# Altium PCB mainPower_V2.PcbDoc
Units mm, origin at the board's own origin, x right, y up, seen from the top; angles counter-clockwise.
Board outline 71.12 x 47.37 mm, 2 copper layers (Top Layer, Bottom Layer); 57 components, 26 nets, 176 pads, 299 vias.
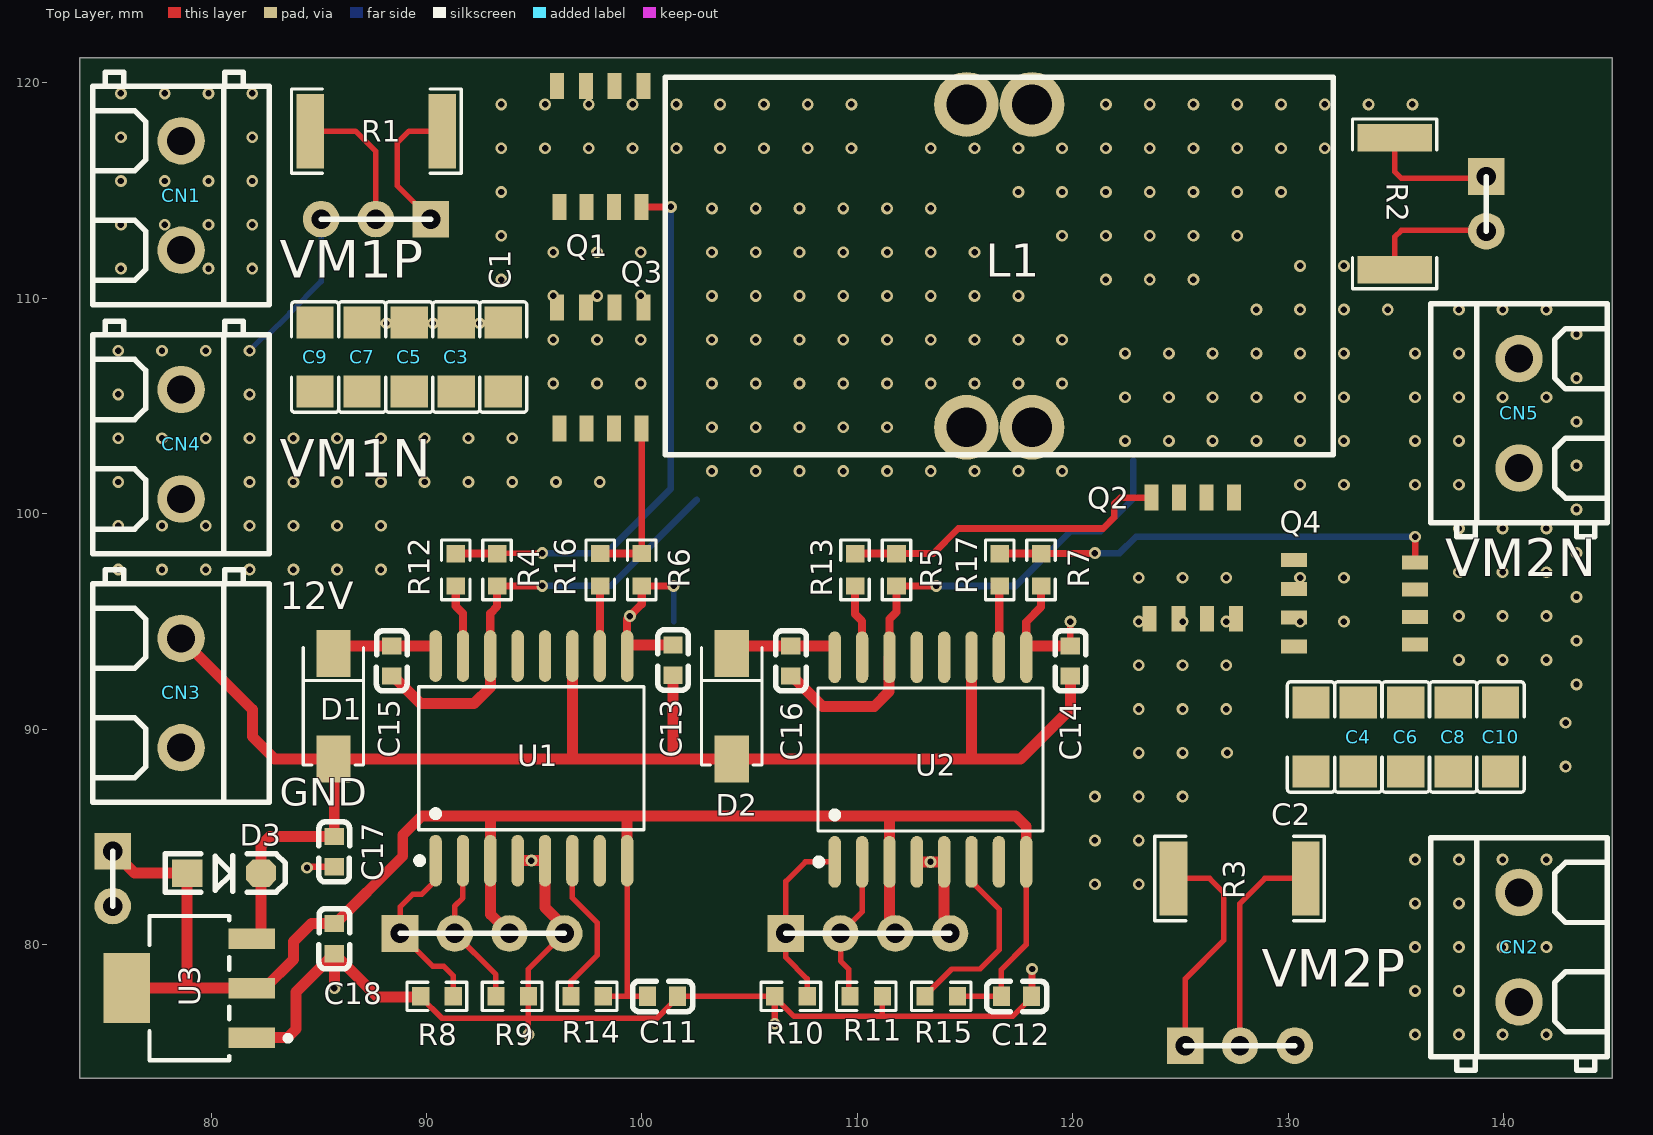
[diagram p0: Top Layer view]
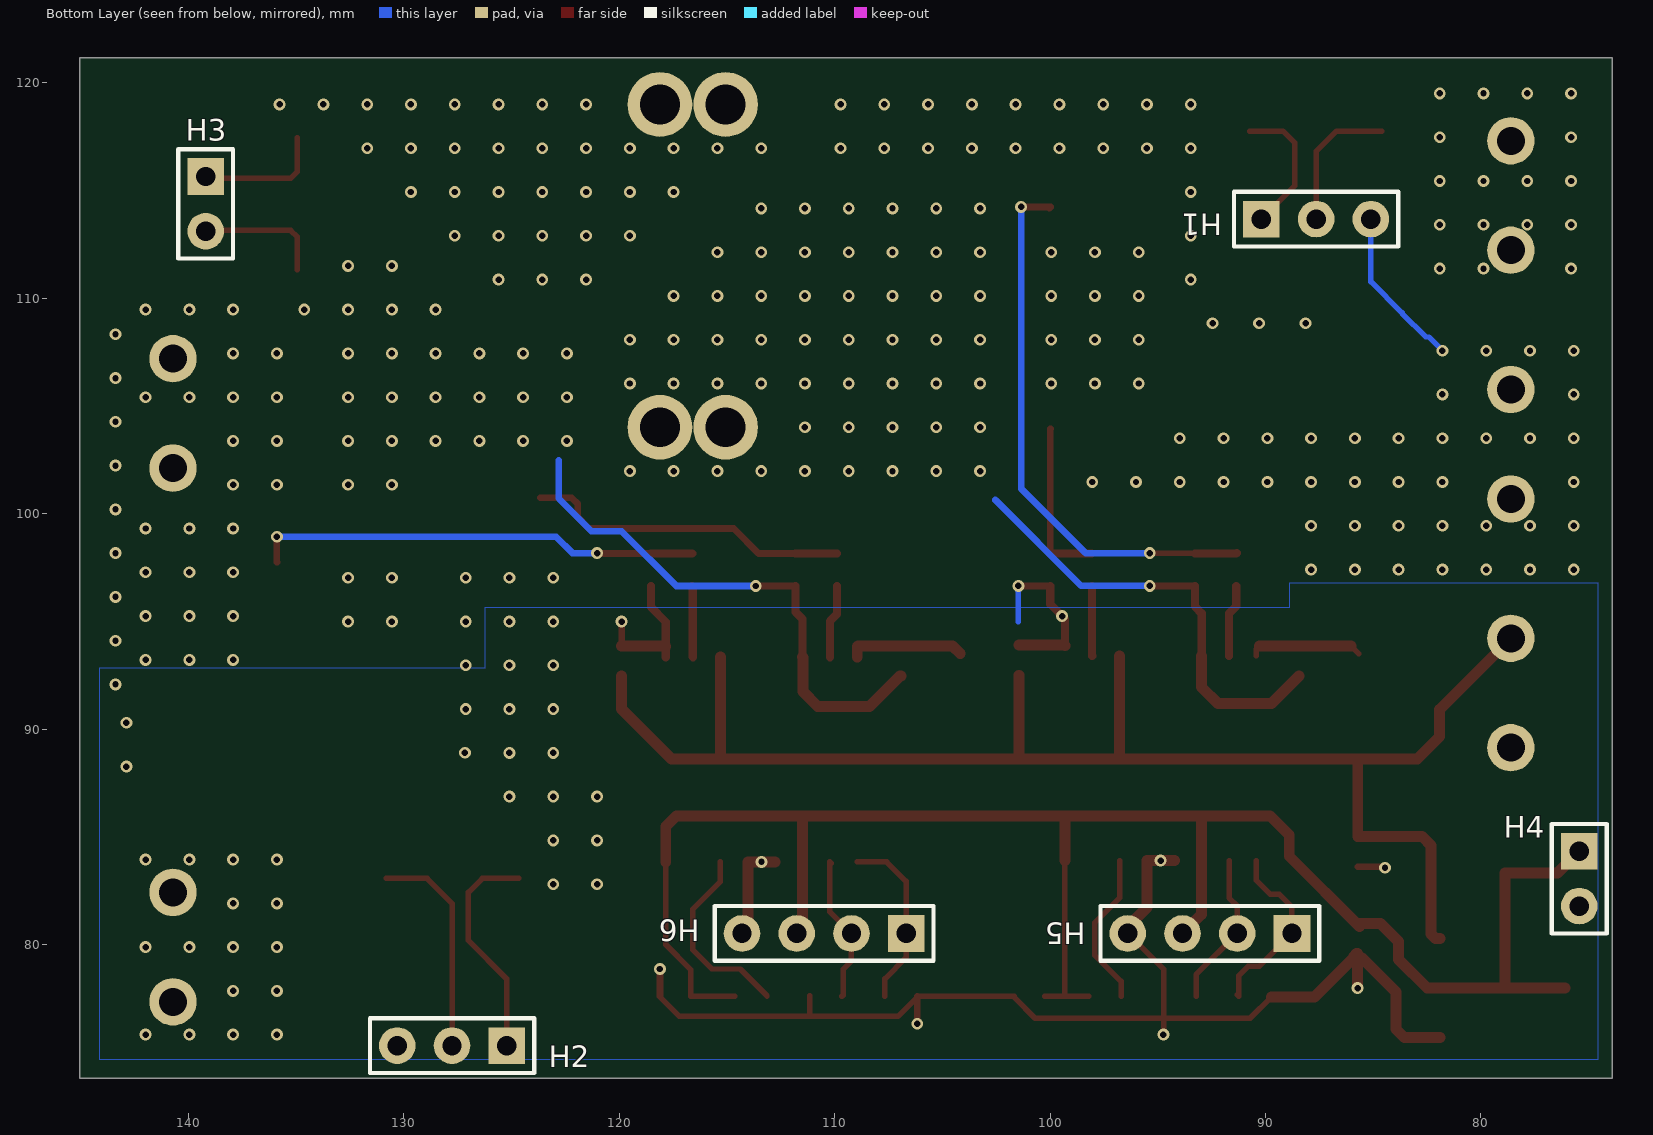
[diagram p1: Bottom Layer view, seen from below]

## Layer stack, top to bottom
Top Solder: solder mask 0.0102, Solder Resist, Dk 3.5
Top Layer: signal copper 0.0356
Dielectric 1: dielectric 0.32, FR-4, Dk 4.8
Bottom Layer: signal copper 0.0356
Bottom Solder: solder mask 0.0102, Solder Resist, Dk 3.5

## Board outline
73.914,73.787 145.034,73.787 145.034,121.158 73.914,121.158

## Design rules (kind name [scope] priority, off if disabled: settings)
AssemblyTestPointUsage [All] p0: scope1count=1 scope1_0_kind=Board scope1_0_value=Board scope2count=1 scope2_0_kind=Board scope2_0_value=Board commentlength=0
AssemblyTestpoint [All] p0: scope1count=1 scope1_0_kind=Board scope1_0_value=Board scope2count=1 scope2_0_kind=Board scope2_0_value=Board commentlength=0
Clearance [All] p0: scope1count=1 scope1_0_kind=Board scope1_0_value=Board scope2count=1 scope2_0_kind=Board scope2_0_value=Board commentlength=0 gap=0.6
Clearance [All] p1: gap=0.6 ignorepadtopadclearanceinfootprint=TRUE except(0.254: Arc-Arc Arc-Track Arc-SMDPad Arc-THPad Arc-Via Arc-Fill Arc-Poly Arc-Region Arc-Text Arc-Hole Track-Track Track-SMDPad Track-THPad Track-Via Track-Fill Track-Poly Track-Region Track-Text Track-Hole)
ComponentClearance [All] p0: scope1count=1 scope1_0_kind=Board scope1_0_value=Board scope2count=1 scope2_0_kind=Board scope2_0_value=Board commentlength=0 gap=0.254 collisioncheckmode=3
DiffPairsRouting [All] p0: scope1count=1 scope1_0_kind=Board scope1_0_value=Board scope2count=1 scope2_0_kind=Board scope2_0_value=Board commentlength=0
FabricationTestPointUsage [All] p0: scope1count=1 scope1_0_kind=Board scope1_0_value=Board scope2count=1 scope2_0_kind=Board scope2_0_value=Board commentlength=0 valid=0 allowmultiple=FALSE
FabricationTestpoint [All] p0: scope1count=1 scope1_0_kind=Board scope1_0_value=Board scope2count=1 scope2_0_kind=Board scope2_0_value=Board commentlength=0 side=3 testpointundercomponent=TRUE minsize=1.016 maxsize=2.54 preferedsize=1.524 minholesize=0 maxholesize=1.016 preferedholesize=0.813 testpointgrid=0.025
FanoutControl Fanout_BGA [All] p0 off: scope1count=1 scope1_0_kind=Board scope1_0_value=Board scope2count=1 scope2_0_kind=Board scope2_0_value=Board commentlength=69 // Protel DXP Scope 1 Expression Was: IsBGA   Fanout_BGA (Default Rule)
FanoutControl Fanout_LCC [All] p0 off: scope1count=1 scope1_0_kind=Board scope1_0_value=Board scope2count=1 scope2_0_kind=Board scope2_0_value=Board commentlength=69 // Protel DXP Scope 1 Expression Was: IsLCC   Fanout_LCC (Default Rule)
FanoutControl Fanout_SOIC [All] p0 off: scope1count=1 scope1_0_kind=Board scope1_0_value=Board scope2count=1 scope2_0_kind=Board scope2_0_value=Board commentlength=71 // Protel DXP Scope 1 Expression Was: IsSOIC   Fanout_SOIC (Default Rule)
FanoutControl Fanout_Small [All] p0 off: scope1count=1 scope1_0_kind=Board scope1_0_value=Board scope2count=1 scope2_0_kind=Board scope2_0_value=Board commentlength=84 // Protel DXP Scope 1 Expression Was: (CompPinCount < 5)   Fanout_Small (Default Rule)
FanoutControl Fanout_Default [All] p0: scope1count=1 scope1_0_kind=Board scope1_0_value=Board scope2count=1 scope2_0_kind=Board scope2_0_value=Board commentlength=30 // Fanout_Default (Default Rule)
Height [All] p0: scope1count=1 scope1_0_kind=Board scope1_0_value=Board scope2count=1 scope2_0_kind=Board scope2_0_value=Board commentlength=0
HoleSize [All] p0: scope1count=1 scope1_0_kind=Board scope1_0_value=Board scope2count=1 scope2_0_kind=Board scope2_0_value=Board commentlength=0 absolutevalues=TRUE maxlimit=2.54 minlimit=0.025 maxpercent=80.000 minpercent=20.000
HoleToHoleClearance [All] p0: scope1count=1 scope1_0_kind=Board scope1_0_value=Board scope2count=1 scope2_0_kind=Board scope2_0_value=Board commentlength=0
LayerPairs [All] p0: scope1count=1 scope1_0_kind=Board scope1_0_value=Board scope2count=1 scope2_0_kind=Board scope2_0_value=Board commentlength=0 enforce=TRUE
MinimumSolderMaskSliver [All] p0: scope1count=1 scope1_0_kind=Board scope1_0_value=Board scope2count=1 scope2_0_kind=Board scope2_0_value=Board commentlength=0
NetAntennae [All] p0: scope1count=1 scope1_0_kind=Board scope1_0_value=Board scope2count=1 scope2_0_kind=Board scope2_0_value=Board commentlength=0
PasteMaskExpansion [All] p0: scope1count=1 scope1_0_kind=Board scope1_0_value=Board scope2count=1 scope2_0_kind=Board scope2_0_value=Board commentlength=0 expansion=0
PlaneClearance [All] p0: scope1count=1 scope1_0_kind=Board scope1_0_value=Board scope2count=1 scope2_0_kind=Board scope2_0_value=Board commentlength=0 clearance=0.508
PlaneConnect [All] p0: scope1count=1 scope1_0_kind=Board scope1_0_value=Board scope2count=1 scope2_0_kind=Board scope2_0_value=Board commentlength=0 planeconnectstyle=Relief reliefexpansion=0.508 reliefentries=4 reliefconductorwidth=0.254 reliefairgap=0.254
PolygonConnect PolygonConnect_3 [All] p0 off: scope1count=1 scope1_0_kind=Board scope1_0_value=Board scope2count=1 scope2_0_kind=Board scope2_0_value=Board commentlength=69 connectstyle=Direct reliefconductorwidth=0.254 reliefentries=4 polygonreliefangle="90 Angle" // Protel DXP Scope 2 Expression Was: IsNamedPolygon('C1N_L02_P000')
PolygonConnect PolygonConnect_2 [All] p0 off: scope1count=1 scope1_0_kind=Board scope1_0_value=Board scope2count=1 scope2_0_kind=Board scope2_0_value=Board commentlength=71 connectstyle=Direct reliefconductorwidth=0.254 reliefentries=4 polygonreliefangle="90 Angle" // Protel DXP Scope 2 Expression Was: IsNamedPolygon('NONET_L02_P000')
PolygonConnect PolygonConnect_1 [All] p0 off: scope1count=1 scope1_0_kind=Board scope1_0_value=Board scope2count=1 scope2_0_kind=Board scope2_0_value=Board commentlength=71 connectstyle=Direct reliefconductorwidth=0.254 reliefentries=4 polygonreliefangle="90 Angle" // Protel DXP Scope 2 Expression Was: IsNamedPolygon('NONET_L02_P000')
PolygonConnect [All] p0: scope1count=1 scope1_0_kind=Board scope1_0_value=Board scope2count=1 scope2_0_kind=Board scope2_0_value=Board commentlength=0 connectstyle=Relief reliefconductorwidth=0.254 reliefentries=4 polygonreliefangle="90 Angle"
PolygonConnect PolygonConnect_3 [All vs IsNamedPolygon('C1N_L02_P000')] p1: connectstyle=Direct reliefconductorwidth=0.254 reliefentries=4 polygonreliefangle="90 Angle" airgapwidth=0.254
PolygonConnect PolygonConnect_2 [All vs IsNamedPolygon('NONET_L02_P000')] p2: connectstyle=Direct reliefconductorwidth=0.254 reliefentries=4 polygonreliefangle="90 Angle" airgapwidth=0.254
PolygonConnect PolygonConnect_1 [All vs IsNamedPolygon('NONET_L02_P000')] p3: connectstyle=Direct reliefconductorwidth=0.254 reliefentries=4 polygonreliefangle="90 Angle" airgapwidth=0.254
PolygonConnect [All] p4: connectstyle=Relief reliefconductorwidth=0.254 reliefentries=4 polygonreliefangle="90 Angle" airgapwidth=0.254
RoutingCorners [All] p0: scope1count=1 scope1_0_kind=Board scope1_0_value=Board scope2count=1 scope2_0_kind=Board scope2_0_value=Board commentlength=0 cornerstyle=45-Degree minsetback=2.54 maxsetback=2.54
RoutingLayers [All] p0: scope1count=1 scope1_0_kind=Board scope1_0_value=Board scope2count=1 scope2_0_kind=Board scope2_0_value=Board commentlength=0 top layer=Automatic bottom layer=Automatic
RoutingPriority [All] p0: scope1count=1 scope1_0_kind=Board scope1_0_value=Board scope2count=1 scope2_0_kind=Board scope2_0_value=Board commentlength=0
RoutingTopology [All] p0: scope1count=1 scope1_0_kind=Board scope1_0_value=Board scope2count=1 scope2_0_kind=Board scope2_0_value=Board commentlength=0 topology=Shortest
RoutingVias [All] p0: scope1count=1 scope1_0_kind=Board scope1_0_value=Board scope2count=1 scope2_0_kind=Board scope2_0_value=Board commentlength=0 holewidth=0.711 width=1.27 viastyle="Through Hole" minholewidth=0.711 minwidth=1.27 maxholewidth=0.711 maxwidth=1.27
RoutingVias [All] p1: holewidth=0.711 width=1.27 viastyle="Through Hole" minholewidth=0.711 minwidth=1.27 maxholewidth=0.711 maxwidth=1.27
ShortCircuit [All] p0: scope1count=1 scope1_0_kind=Board scope1_0_value=Board scope2count=1 scope2_0_kind=Board scope2_0_value=Board commentlength=0 allowed=FALSE
SilkToBoardRegionClearance [All] p0: scope1count=1 scope1_0_kind=Board scope1_0_value=Board scope2count=1 scope2_0_kind=Board scope2_0_value=Board commentlength=0
SilkToSilkClearance [All] p0: scope1count=1 scope1_0_kind=Board scope1_0_value=Board scope2count=1 scope2_0_kind=Board scope2_0_value=Board commentlength=0
SilkToSolderMaskClearance [All] p0 off: scope1count=1 scope1_0_kind=Board scope1_0_value=Board scope2count=1 scope2_0_kind=Board scope2_0_value=Board commentlength=44 // Protel DXP Scope 1 Expression Was: IsPad
SolderMaskExpansion [All] p0: scope1count=1 scope1_0_kind=Board scope1_0_value=Board scope2count=1 scope2_0_kind=Board scope2_0_value=Board commentlength=0 expansion=0.102
SolderMaskExpansion [All] p1: expansion=0.102 istentingtop=FALSE
UnRoutedNet [All] p0: scope1count=1 scope1_0_kind=Board scope1_0_value=Board scope2count=1 scope2_0_kind=Board scope2_0_value=Board commentlength=0
UnpouredPolygon [All] p0: scope1count=1 scope1_0_kind=Board scope1_0_value=Board scope2count=1 scope2_0_kind=Board scope2_0_value=Board commentlength=0
Width [All] p0: scope1count=1 scope1_0_kind=Board scope1_0_value=Board scope2count=1 scope2_0_kind=Board scope2_0_value=Board commentlength=0 maxlimit=1.27 minlimit=0.203 preferedwidth=0.254
Width [All] p1: maxlimit=1.27 minlimit=0.203 preferedwidth=0.254
30 further rules are at their usual default settings.

## Components (designator, comment, footprint, x,y, rotation, side; value= is the part's Value field where it differs from the comment)
C1 "22uF100V" C1206 93.564,107.273 r270 top
C2 "22uF100V" C1206 131.055,89.635 r90 top
C3 "22uF100V" C1206 91.38,107.273 r270 top
C4 "22uF100V" C1206 133.257,89.635 r90 top
C5 "22uF100V" C1206 89.197,107.273 r90 top
C6 "22uF100V" C1206 135.458,89.635 r270 top
C7 "22uF100V" C1206 87.013,107.273 r270 top
C8 "22uF100V" C1206 137.659,89.635 r90 top
C9 "22uF100V" C1206 84.83,107.273 r270 top
C10 "22uF100V" C1206 139.86,89.635 r90 top
C11 "470nF" C0603 100.957,77.597 r180 top
C12 "470nF" C0603 117.39,77.597 r180 top
C13 "470nF" C0603 101.445,93.203 r270 top
C14 "470nF" C0603 119.892,93.166 r270 top
C15 "100nF" C0603 88.388,93.166 r270 top
C16 "100nF" C0603 106.918,93.166 r270 top
C17 "1uF" C0603 85.72,84.314 r90 top
C18 "1uF" C0603 85.725,80.279 r90 top
CN1 "1729128" CONN-TH_2P-P5.08 78.613,114.772 r270 top
CN2 "1729128" CONN-TH_2P-P5.08 140.716,79.883 r90 top
CN3 "1729128" CONN-TH_2P-P5.08 78.613,91.679 r270 top
CN4 "1729128" CONN-TH_2P-P5.08 78.613,103.226 r270 top
CN5 "1729128" CONN-TH_2P-P5.08 140.716,104.657 r90 top
D1 "SS54" SMA 85.68,91.062 r90 top
D2 "SS54" SMA 104.171,91.062 r90 top
D3 "1N5819W(SOD-123)" SOD-123 80.608,83.319 r0 top
H1 "" HDR2.54-LI-3P 87.65,113.677 r180 bottom
H2 "Header-Male-2.54_1x3" HDR2.54-LI-3P 127.762,75.311 r0 bottom
H3 "Header-Male-2.54_1x2" HDR2.54-LI-2P 139.196,114.384 r270 bottom
H4 "Header-Male-2.54_1x2" HDR2.54-LI-2P 75.438,83.058 r270 bottom
H5 "Header-Male-2.54_1x4" HDR2.54-LI-4P 92.583,80.518 r0 bottom
H6 "Header-Male-2.54_1x4" HDR2.54-LI-4P 110.49,80.518 r0 bottom
L1 "47uH 30A" 106-125立式 115.062,107.061 r0 top
Q1 "BSC070N10NS3 G" INF-PG-TDSON-8-1_V 98.069,117.064 r0 top
Q2 "BSC070N10NS3 G" INF-PG-TDSON-8-1_V 125.568,97.921 r180 top
Q3 "BSC070N10NS3 G" INF-PG-TDSON-8-1_V 98.069,106.776 r0 top
Q4 "BSC070N10NS3 G" INF-PG-TDSON-8-1_V 133.061,95.843 r90 top
R1 "0.0035 ohm" R2512 87.673,117.764 r0 top
R2 "0.0035 ohm" R2512 134.946,114.384 r270 top
R3 "0.0035 ohm" R2512 127.742,83.069 r0 top
R4 "10k" R0603 93.277,97.398 r90 top
R5 "10k" R0603 111.818,97.398 r270 top
R6 "10k" R0603 99.99,97.398 r90 top
R7 "10k" R0603 118.531,97.398 r90 top
R8 "10k" R0603 90.484,77.597 r180 top
R9 "10k" R0603 93.98,77.597 r0 top
R10 "10k" R0603 106.918,77.597 r180 top
R11 "10k" R0603 110.414,77.597 r0 top
R12 "10 ohm" R0603 91.355,97.398 r90 top
R13 "10 ohm" R0603 109.896,97.398 r90 top
R14 "3.3k" R0603 97.461,77.597 r180 top
R15 "3.3k" R0603 113.895,77.597 r180 top
R16 "10 ohm" R0603 98.069,97.398 r90 top
R17 "10 ohm" R0603 116.61,97.398 r90 top
U1 "SI8233BD-D-IS" SOIC-16_L10.3-W7.5-P1.27-LS10.3-BL 94.869,88.646 r0 top
U2 "SI8233BD-D-IS" SOIC-16_L10.3-W7.5-P1.27-LS10.3-BL 113.396,88.591 r0 top
U3 "TLV1117-50IDCY" FP-DCY0004A-MFG 78.994,77.978 r180 top

## Footprints (in the part's own frame and the unit in brackets; to place one, negate y for a bottom-side part, rotate by r counter-clockwise, add the part's x,y. Pads: shape width x height; smd on the part's side, far side on the other; paste and mask are expansions set on the pad)
106-125立式 [mm]
  round 3 hole 1.85: 1(0,-3.048) 1(3.048,-3.048) 2(0,11.938) 2(3.048,11.938)
  silkscreen extent -13.98,-4.32 17.02,13.21
C0603 [mm]
  rect 0.8x0.9 smd: 1(-0.7,0) 2(0.7,0)
  silkscreen extent -1.41,-0.71 1.39,0.72
C1206 [mm]
  rect 1.485x1.728 smd: 1(-1.593,0) 2(1.593,0)
  silkscreen extent -2.56,-1.09 2.56,1.09
CONN-TH_2P-P5.08 [mm]
  round 2.2 hole 1.3 mask+0: 1(-2.54,0) 2(2.54,0)
  silkscreen extent -5.72,-4.1 5.08,4.1
FP-DCY0004A-MFG [mm]
  rect 2.15x0.95 smd paste+0 mask+0: 1(-2.9,2.3) 2(-2.9,0) 3(-2.9,-2.3)
  rect 2.15x3.25 smd paste+0 mask+0: 4(2.9,0)
  silkscreen extent -4.7,-3.35 1.85,3.35
HDR2.54-LI-2P [mm] "排针，2脚"
  rect 1.7x1.7 hole 0.9: 1(-1.27,0)
  round 1.7 hole 0.9: 2(1.27,0)
  silkscreen extent -2.54,-1.27 2.54,1.27
HDR2.54-LI-3P [mm] "排针，3脚"
  rect 1.7x1.7 hole 0.9: 1(-2.54,0)
  round 1.7 hole 0.9: 2(0,0) 3(2.54,0)
  silkscreen extent -3.81,-1.27 3.81,1.27
HDR2.54-LI-4P [mm] "排针，4脚"
  rect 1.7x1.7 hole 0.9: 1(-3.81,0)
  round 1.7 hole 0.9: 2(-1.27,0) 3(1.27,0) 4(3.81,0)
  silkscreen extent -5.08,-1.27 5.08,1.27
INF-PG-TDSON-8-1_V [mm] "TDSON, 8-Leads, Body 6.15x5.15mm, Pitch 1.27mm"
  rect 0.65x1.2 smd: 1(-1.905,-2.825) 2(-0.635,-2.825) 3(0.635,-2.825) 4(1.905,-2.825) 5(2.007,2.794) 6(0.66,2.794) 7(-0.66,2.794) 8(-2.007,2.794)
R0603 [mm]
  rect 0.806x0.864 smd: 1(-0.753,0) 2(0.753,0)
  silkscreen extent -1.39,-0.66 1.39,0.66
R2512 [mm]
  rect 1.283x3.456 smd: 1(-3.066,0) 2(3.066,0)
  silkscreen extent -3.94,-1.96 3.94,1.96
SMA [mm]
  rect 2.185x1.593 smd: 1(-2.442,0) 2(2.442,0)
  silkscreen extent -2.73,-1.4 2.73,1.4
SOD-123 [mil] "2.7x1.6X1.1mm（长宽高，不包括引脚）"
  rect 55x50 smd: 1(-67.5,0)
  oct 55x50 smd: 2(67.5,0)
  silkscreen extent -108,-35 112,35
SOIC-16_L10.3-W7.5-P1.27-LS10.3-BL [mm]
  oval 0.574x2.401 smd: 1(-4.445,-4.75) 2(-3.175,-4.75) 3(-1.905,-4.75) 4(-0.635,-4.75) 5(0.635,-4.75) 6(1.905,-4.75) 7(3.175,-4.75) 8(4.445,-4.75) 9(4.445,4.75) 10(3.175,4.75) 11(1.905,4.75) 12(0.635,4.75) 13(-0.635,4.75) 14(-1.905,4.75) 15(-3.175,4.75) 16(-4.445,4.75)
  silkscreen extent -5.33,-4.9 5.23,3.32

## Part data
C1 C2 C3 C4 C5 C6 C7 C8 C9 C10: library part C1206
C11 C12 C13 C14 C15 C16 C17 C18: library part C0603
CN1 CN2 CN3 CN4 CN5: library part MKDSN5.08-2P, "间距:5.08mm;排数:1;每排PIN数:2;安装方式:直针;额定电流:13.5A;额定电压:400V;工作温度范围:-;颜色:绿色;"
D1 D2: library part SS34(SMA)
H1: library part Header-Male-2.54_1x3
L1: library part 106-125铁硅铝磁环电感
Q1 Q2 Q3 Q4: library part BSC070N10NS3G, "N-Channel OptiMOS 3 Power-Transistor, 100?V VDS, 90?A ID, -55?to 150 degC, PG-TDSON-8-1, Reel, Green"
R1 R2 R3: library part R2512
R4 R5 R6 R7 R8 R9 R10 R11 R12 R13 R14 R15 R16 R17: library part R0603
U1 U2: "高速隔离半桥栅极驱动器"
U3: library part CMP-04917-000165-1, "IC REG LINEAR 5V 800MA SOT223-4"

## Via types
v1: diameter 0.55, hole 0.3, Top Layer to Bottom Layer, 299 vias

## Nets (pads, with @x,y where several pads share a name; then routed paths per layer and width w, separated by ;. In a path a pad name is that pad's centre, name@x,y a point inside that pad or via, vN(x,y) a via of type N, cw(c..) or ccw(c..) an arc to the next point about the centre after c; other vN are vias at no path point)
+5: C11.2 C12.2 C18.2 D3.1 H4.1 H5.3 H6.3 R14.1 R15.1 U1.3 U1.8 U2.3 U2.8 U3.2 U3.4 | length 87.9
  Top Layer w0.254: R14.1 99.235,77.597 ; U1.8 99.314,77.676 99.235,77.597 ; C11.2 99.235,77.597 ; 111.491,85.979 111.618,85.979 ; R15.1 C12.2 116.69,78.844 117.841,79.995 U2.8
  Top Layer w0.508: H4.1 76.447,83.319 D3.1 78.894,78.078 78.994,77.978 ; U3.4 78.994,77.978 ; C18.2@85.629,80.833 88.9,84.103 88.9,85.09 89.789,85.979 92.964,85.979 ; C18.2 84.661,80.978 83.823,80.14 83.823,79.307 82.494,77.978 U3.2 78.994,77.978 ; H5.3 92.964,81.407 U1.3 92.964,85.979 ; U1.8 99.314,85.979 ; H6.3@111.491,80.518 U2.3 111.491,85.979 99.314,85.979 ; 111.618,85.979 117.348,85.979 117.841,85.486 U2.8 ; 92.964,85.979 99.314,85.979
+12: C13.2 C14.2 C17.2 CN3.1 D1.1 D2.1 D3.2 U1.11 U2.11 U3.3 | length 72
  Top Layer w0.508: CN3.1 81.915,90.917 81.915,89.662 82.958,88.619 D1.1 ; U3.3 82.102,80.278 82.323,80.499 D3.2 82.323,84.609 82.727,85.013 C17.2 85.72,88.58 D1.1 ; U1.11 96.774,88.619 ; C13.2 101.445,88.647 101.473,88.619 ; U2.11 115.301,88.634 115.316,88.619 ; C14.2 119.888,92.462 119.888,90.932 117.575,88.619 115.316,88.619 ; D1.1 96.774,88.619 ; 96.774,88.619 98.779,88.619 101.473,88.619 ; 101.473,88.619 D2.1 115.316,88.619
A_HS: C15.2 L1.1 Q1.1 Q1.2 Q1.3 Q3.5 Q3.6 Q3.7 Q3.8 R4.1 U1.14 | length 21.2
  Top Layer w0.254: C15.2 C15.2@88.438,92.466
  Top Layer w0.308: R4.1 95.377,96.645 v1@95.377,96.647
  Top Layer w0.381: U1.14 92.964,95.377 93.277,95.69 R4.1
  Top Layer w0.508: C15.2@88.438,92.466 89.718,91.186 92.202,91.186 92.964,91.948 U1.14
  Bottom Layer w0.308: v1(95.377,96.649) 98.554,96.649 102.541,100.636
  other v1: 103.251,101.981 105.283,101.981 107.315,101.981 109.347,101.981 111.379,101.981 113.411,101.981 115.443,101.981 117.475,101.981 119.507,101.981 103.251,104.013 105.283,104.013 107.315,104.013 109.347,104.013 111.379,104.013 95.885,106.045 97.917,106.045 99.949,106.045 103.251,106.045 105.283,106.045 107.315,106.045 109.347,106.045 111.379,106.045 113.411,106.045 115.443,106.045 117.475,106.045 119.507,106.045 95.885,108.077 97.917,108.077 99.949,108.077 103.251,108.077 105.283,108.077 107.315,108.077 109.347,108.077 111.379,108.077 113.411,108.077 115.443,108.077 117.475,108.077 119.507,108.077 95.885,110.109 97.917,110.109 99.949,110.109 103.251,110.109 105.283,110.109 107.315,110.109 109.347,110.109 111.379,110.109 113.411,110.109 115.443,110.109 117.475,110.109 95.885,112.141 97.917,112.141 99.949,112.141 103.251,112.141 105.283,112.141 107.315,112.141 109.347,112.141 111.379,112.141 113.411,112.141 115.443,112.141 103.251,114.173 105.283,114.173 107.315,114.173 109.347,114.173 111.379,114.173 113.411,114.173
AmosH: Q1.4 R4.2 R12.2 | length 25.9
  Top Layer w0.254: R4.2 93.297,98.171 v1@95.377,98.171
  Top Layer w0.308: Q1.4@100.038,114.175 Q1.4 101.346,114.239 v1(101.346,114.241) v1@101.346,114.3
  Top Layer w0.381: R12.2@91.334,98.172 R12.2 R4.2
  Bottom Layer w0.308: v1(95.377,98.173) 98.35,98.173 101.346,101.169 v1(101.346,114.241)
AmosL: Q3.4 R6.2 R16.2 | length 7.8
  Top Layer w0.254: R16.2@98.044,98.176 R16.2
  Top Layer w0.308: Q3.4 99.99,103.951 R6.2
  Top Layer w0.381: R16.2 R6.2
B_HS: C16.2 H3.2 Q2.1 Q2.2 Q2.3 Q4.5 Q4.6 Q4.7 Q4.8 R2.2 R5.2 U2.14 | length 30.8
  Top Layer w0.254: R2.2 134.946,112.848 135.255,113.157 139.153,113.157 H3.2
  Top Layer w0.308: R5.2 v1(113.663,96.645) v1@113.665,96.647
  Top Layer w0.381: U2.14 111.491,95.108 111.818,95.435 R5.2
  Top Layer w0.508: C16.2 106.968,92.466 108.375,91.059 110.786,91.059 111.478,91.752 111.478,93.329 U2.14
  Bottom Layer w0.308: v1(113.663,96.645) 117.346,96.645 119.888,99.187 121.285,99.187 122.809,100.711 122.809,102.489
  other v1: 130.556,94.996 132.588,94.996 130.556,97.028 132.588,97.028 130.556,101.346 132.588,101.346 122.428,103.378 124.46,103.378 126.492,103.378 128.524,103.378 130.556,103.378 132.588,103.378 122.428,105.41 124.46,105.41 126.492,105.41 128.524,105.41 130.556,105.41 132.588,105.41 122.428,107.442 124.46,107.442 126.492,107.442 128.524,107.442 130.556,107.442 132.588,107.442 128.524,109.474 130.556,109.474 132.588,109.474 134.62,109.474 130.556,111.506 132.588,111.506
BmosH: Q2.4 R5.1 R13.2 | length 15.2
  Top Layer w0.308: R5.1 113.528,98.151 113.528,98.161 114.681,99.314 121.412,99.314 121.92,99.822 121.92,100.457 122.209,100.746 Q2.4
  Top Layer w0.381: R13.2 R5.1
BmosL: Q4.4 R7.2 R17.2 | length 20.8
  Top Layer w0.308: R7.2 121.011,98.151 v1(121.031,98.171) ; Q4.4 135.89,97.752 v1(135.89,98.933)
  Top Layer w0.381: R17.2 R7.2
  Bottom Layer w0.308: v1(121.031,98.171) 122.174,98.171 122.936,98.933 v1(135.89,98.933)
C1N: C1.2 C2.2 C3.2 C4.2 C5.1 C6.1 C7.2 C8.2 C9.2 C10.2 C11.1 C12.1 C13.1 C14.1 C17.1 C18.1 CN3.2 CN4.1 CN4.2 CN5.1 CN5.2 H1.3 H2.3 H4.2 H5.4 H6.4 Q3.1 Q3.2 Q3.3 Q4.1 Q4.2 Q4.3 R6.1 R7.1 R8.2 R9.2 R10.2 R11.2 U1.4 U1.5 U1.9 U2.4 U2.5 U2.9 U3.1 | length 85.2
  Top Layer w0.254: R8.2@89.731,77.568 90.718,76.581 94.733,76.581 ; v1(94.742,75.819) 94.733,75.828 94.733,76.581 ; H5.4 94.733,78.858 R9.2 94.733,76.581 ; R10.2@106.165,77.568 107.067,76.666 111.167,76.666 ; R10.2 C11.1 101.656,77.547 100.69,76.581 94.733,76.581 ; R11.2@111.167,77.626 R11.2 111.167,76.666 ; C12.1 118.09,77.547 117.209,76.666 111.167,76.666
  Top Layer w0.308: v1(84.455,83.566) 84.455,83.614 C17.1 ; R6.1 101.473,96.645 v1(101.473,96.647) ; R10.2 106.165,77.568 v1(106.165,76.327) v1@106.172,76.327 ; C12.1 118.11,77.597 v1(118.11,78.867) ; v1(119.888,94.996) 119.89,94.994 119.89,93.868 C14.1
  Top Layer w0.381: U1.9@99.314,93.873 99.314,95.123 99.99,95.799 R6.1 ; U2.9 117.841,93.835 117.841,94.981 118.531,95.671 R7.1
  Top Layer w0.508: U3.1 83.552,75.678 83.947,76.073 83.947,77.801 C18.1@85.529,79.383 ; v1(85.725,77.978) C18.1 85.775,79.579 85.921,79.433 85.921,79.383 87.735,77.568 R8.2@89.731,77.568 ; U1.4 v1(94.869,83.896) U1.5 95.504,81.73 96.393,80.841 H5.4 ; U1.9@99.314,93.873 99.344,93.903 C13.1 ; U2.4 v1(113.396,83.841) U2.5 H6.4@114.031,80.518 ; U2.9@117.841,93.835 117.871,93.866 C14.1
  Bottom Layer w0.254: v1(81.788,107.569) 82.423,108.204 82.562,108.204 83.658,109.3 83.658,109.327 85.11,110.779 H1.3 ; 101.473,94.996 v1(101.473,96.647)
  other v1: 142.875,88.265 142.875,90.297 143.383,92.075 137.922,93.218 139.954,93.218 141.986,93.218 143.383,94.107 99.441,95.25 137.922,95.25 139.954,95.25 141.986,95.25 143.383,96.139 137.922,97.282 139.954,97.282 141.986,97.282 75.692,97.409 77.724,97.409 79.756,97.409 81.788,97.409 83.82,97.409 85.852,97.409 87.884,97.409 143.383,98.171 137.922,99.314 139.954,99.314 141.986,99.314 75.692,99.441 77.724,99.441 79.756,99.441 81.788,99.441 83.82,99.441 85.852,99.441 87.884,99.441 143.383,100.203 135.89,101.346 137.922,101.346 75.692,101.473 81.788,101.473 83.82,101.473 85.852,101.473 87.884,101.473 89.916,101.473 91.948,101.473 93.98,101.473 96.012,101.473 98.044,101.473 143.383,102.235 135.89,103.378 137.922,103.378 75.692,103.505 77.724,103.505 79.756,103.505 81.788,103.505 83.82,103.505 85.852,103.505 87.884,103.505 89.916,103.505 91.948,103.505 93.98,103.505 143.383,104.267 135.89,105.41 137.922,105.41 139.954,105.41 141.986,105.41 75.692,105.537 81.788,105.537 143.383,106.299 135.89,107.442 137.922,107.442 75.692,107.569 77.724,107.569 79.756,107.569 143.383,108.331 137.922,109.474 139.954,109.474 141.986,109.474
C1P: C1.1 C3.1 C5.2 C7.1 C9.1 H1.1 Q1.5 Q1.6 Q1.7 Q1.8 R1.2 | length 6.5
  Top Layer w0.254: H1.1 88.646,115.222 88.646,117.221 89.189,117.764 R1.2
  other v1: 88.138,108.839 90.297,108.839 92.456,108.839 93.472,110.871 93.472,112.903 93.472,114.935 93.472,116.967 95.504,116.967 97.536,116.967 99.568,116.967 101.6,116.967 103.632,116.967 105.664,116.967 107.696,116.967 109.728,116.967 93.472,118.999 95.504,118.999 97.536,118.999 99.568,118.999 101.6,118.999 103.632,118.999 105.664,118.999 107.696,118.999 109.728,118.999
C2P: C2.1 C4.1 C6.2 C8.1 C10.1 H2.1 Q2.5 Q2.6 Q2.7 Q2.8 R3.1 | length 10.4
  Top Layer w0.254: R3.1 126.354,83.069 127,82.423 127,80.192 125.222,78.414 H2.1
  other v1: 121.031,82.804 123.063,82.804 121.031,84.836 123.063,84.836 121.031,86.868 123.063,86.868 125.095,86.868 123.063,88.9 125.095,88.9 127.166,88.905 123.063,90.932 125.095,90.932 127.127,90.932 123.063,92.964 125.095,92.964 127.127,92.964 123.063,94.996 125.095,94.996 127.127,94.996 123.063,97.028 125.095,97.028 127.127,97.028
Iin+: CN1.1 CN1.2 H1.2 R1.1 | length 6.6
  Top Layer w0.254: R1.1 86.706,117.764 87.65,116.82 H1.2
  other v1: 75.819,111.381 79.883,111.381 81.915,111.381 75.819,113.413 77.851,113.413 79.883,113.413 81.915,113.413 75.819,115.445 77.851,115.445 79.883,115.445 81.915,115.445 75.819,117.477 81.915,117.477 75.819,119.509 77.851,119.509 79.883,119.509 81.915,119.509
IL+: H3.1 L1.2 R2.1 | length 6
  Top Layer w0.254: R2.1 134.946,115.879 135.255,115.57 139.112,115.57 H3.1
  other v1: 121.539,110.871 123.571,110.871 125.603,110.871 119.507,112.903 121.539,112.903 123.571,112.903 125.603,112.903 127.635,112.903 117.475,114.935 119.507,114.935 121.539,114.935 123.571,114.935 125.603,114.935 127.635,114.935 129.667,114.935 113.411,116.967 115.443,116.967 117.475,116.967 119.507,116.967 121.539,116.967 123.571,116.967 125.603,116.967 127.635,116.967 129.667,116.967 131.699,116.967 121.539,118.999 123.571,118.999 125.603,118.999 127.635,118.999 129.667,118.999 131.699,118.999 133.731,118.999 135.763,118.999
Iout-: CN2.1 CN2.2 H2.2 R3.2 | length 10.1
  Top Layer w0.254: H2.2@127.742,75.311 127.742,81.895 128.916,83.069 R3.2
  other v1: 135.89,75.819 137.922,75.819 139.954,75.819 141.986,75.819 135.89,77.851 137.922,77.851 135.89,79.883 137.922,79.883 139.954,79.883 141.986,79.883 135.89,81.915 137.922,81.915 135.89,83.947 137.922,83.947 139.954,83.947 141.986,83.947
NetC15_1: C15.1 D1.2 U1.16 | length 5.3
  Top Layer w0.254: D1.2 D1.2@86.042,93.866 ; U1.16@90.276,93.866 90.424,93.718 U1.16
  Top Layer w0.508: D1.2@86.042,93.866 C15.1 U1.16@90.276,93.866
NetC16_1: C16.1 D2.2 U2.16 | length 5.4
  Top Layer w0.508: D2.2 104.532,93.866 C16.1 108.92,93.866 108.951,93.835 U2.16
NetR12_1: R12.1 U1.15 | length 3.4
  Top Layer w0.381: R12.1 91.355,95.716 91.694,95.377 U1.15
NetR13_1: R13.1 U2.15 | length 3.4
  Top Layer w0.381: R13.1 109.896,95.336 110.221,95.011 U2.15
NetR14_2: R14.2 U1.6 | length 7.3
  Top Layer w0.254: R14.2 96.708,78.293 97.917,79.502 97.917,81.026 96.774,82.169 U1.6
NetR15_2: R15.2 U2.6 | length 9
  Top Layer w0.254: R15.2 113.142,77.626 114.383,78.867 115.697,78.867 116.586,79.756 116.586,81.642 115.301,82.927 U2.6
NetR16_1: R16.1 U1.10 | length 3.3
  Top Layer w0.381: U1.10 98.057,93.409 98.057,96.632 R16.1
NetR17_1: R17.1 U2.10 | length 3.3
  Top Layer w0.381: U2.10 116.591,93.361 116.591,96.625 R17.1
PWMAH: H5.1 R8.1 U1.1 | length 8.6
  Top Layer w0.254: U1.1 90.424,82.982 89.777,82.335 89.359,82.335 88.773,81.749 H5.1 90.297,78.994 90.805,78.994 91.238,78.561 R8.1 R8.1@91.303,77.663
PWMAL: H5.2 R9.1 U1.2 | length 7.2
  Top Layer w0.254: U1.2 91.694,82.169 91.313,81.788 H5.2 93.227,78.604 R9.1
PWMBH: H6.1 R10.1 U2.1 | length 8.4
  Top Layer w0.254: R10.1 107.671,78.41 106.68,79.401 H6.1 106.68,82.931 107.59,83.841 U2.1
PWMBL: H6.2 R11.1 U2.2 | length 6.9
  Top Layer w0.254: R11.1 109.601,77.657 109.601,78.867 109.22,79.248 H6.2 110.221,81.519 U2.2 U2.2@110.16,83.779
pads on no net: U1.7 U1.12 U1.13 U2.7 U2.12 U2.13

## Polygon pours and split planes (outlines as drawn)
C1N on Bottom Layer "C1N_L02_P000" (solid, remove dead copper, pour order 0): 74.549,96.774 88.9,96.774 88.9,95.631 126.238,95.631 126.238,92.837 144.145,92.837 144.145,74.676 74.549,74.676 74.549,79.883

## Silkscreen, mask and mechanical layers (free items; w line width, h text height)
Top Overlay:
  lines w0.254: 75.438,81.788 75.438,84.328 ; 85.11,113.677 90.19,113.677 ; 88.773,80.518 96.393,80.518 ; 106.68,80.518 114.3,80.518 ; 125.222,75.311 130.302,75.311 ; 139.196,113.114 139.196,115.654
  text "VM1P" at 83.187,110.363 h3
  text "VM1N" at 83.187,101.128 h3
  text "VM2N" at 137.289,96.52 h3
  text "12V" at 83.185,95.123 h2.2
  text "GND" at 83.185,86.002 h2.2
  text "VM2P" at 128.78,77.47 h3
Mechanical 1:
  lines w0.254: 73.914,73.787 145.034,73.787 145.034,121.158 73.914,121.158 73.914,87.122 73.914,73.787

## Text inside footprints (layer, text, board x,y; h text height)
U3: Top 3D Body "Header-Male-2.54_1x3" at 91.295,110.032 h1.52